# EAGLE board HM-LC-SW1-PCB (EAGLE 7.7.0)

Size 160 x 100 mm. Coordinates in mm from the lower left corner, seen from the top.
Outline: 0,0 160,0 160,100 0,100 0,0
Copper layers (1*16): Top 0.035mm / dielectric 1.5mm / Bottom 0.035mm
Design rules "default": minimum track width 10mil, minimum drill 24mil, track to track 8mil, track to pad 8mil, pad to pad 8mil, via to via 8mil, smd to smd 8mil, copper to edge 40mil, drill to drill 8mil, minimum pad ring 10mil, minimum via ring 8mil, stop-mask expansion 4mil, vias tented up to drill 0mil, thermal gap 10mil

## Footprints (pad centres in the part's own frame; a part is rotated, then mirrored left to right if it is on the bottom)
LÖTPAD = drill 1 pad 1.93: 1 0,0
C2,54 = drill 0.8 pad 1.6: 1 0,0; 2 0,2.54
EB5D = drill 0.9 pad 1.6: + -1.27,0; - 1.27,0
MINITAST = drill 1.1 pad 1.778: 1A -2.299,3.299; 1B -2.249,-3.201; 2A 2.281,3.299; 2B 2.231,-3.151
CC1101 = smd 2.54 x 1.27: ANT 9.84,-2.38; CSN -10.66,-8.38; GDO0 -10.66,-6.38; GDO2 -10.66,-4.38; GND -10.66,3.62; GNDA1 9.84,-0.38; GNDA2 9.84,-4.38; SCLK -10.66,-0.38; SI -10.66,1.62; SO -10.66,-2.38; VCC -10.66,5.62 | drill 0.8 pad 1.6: ANT1 8.34,-2.38; CSN1 -9.16,-8.38; GDO01 -9.16,-6.38; GDO21 -9.16,-4.38; GND1 -9.16,3.62; GNDA11 8.34,-0.38; GNDA21 8.34,-4.38; SCLK2 -9.16,-0.38; SI2 -9.16,1.62; SO2 -9.16,-2.38; VCC2 -9.16,5.62
TO252-5-11 = smd 0.8 x 1.6: 1 -2.28,-5.41; 2 -1.14,-5.41; 4 1.14,-5.41; 5 2.28,-5.41 | smd 6 x 6: TAB 0,1.3
LED3MM = drill 0.8 pad 1.6: A 1.27,0; K -1.27,0
1/8W = drill 0.9 pad 1.6: 1 0,0; 2 10.16,0
PRO_MINI_WO_RS_A6_A7 = drill 1: A0 7.62,-3.81; A1 7.62,-1.27; A2 7.62,1.27; A3 7.62,3.81; A4 5.08,2.54; A5 5.08,5.08; D2 -7.62,3.81; D3 -7.62,1.27; D4 -7.62,-1.27; D5 -7.62,-3.81; D6 -7.62,-6.35; D7 -7.62,-8.89; D8 -7.62,-11.43; D9 -7.62,-13.97; D10 7.62,-13.97; D11 7.62,-11.43; D12 7.62,-8.89; D13 7.62,-6.35; GND -7.62,6.35; GND@1 7.62,11.43; RAW 7.62,13.97; RST 7.62,8.89; RST@1 -7.62,8.89; RX -7.62,11.43; TX -7.62,13.97; VCC 7.62,6.35

## Placement (x,y rotation side)
+VCC  [LÖTPAD]  -55.88,-48.26 0 top  (outside the outline)
C1  100nF  [C2,54]  -74.93,-69.85 0 top  (outside the outline)
C2  10µF  [EB5D]  -73.66,-86.36 0 top  (outside the outline)
CONFIG  MINITAST  [MINITAST]  -54.61,-25.4 0 top  (outside the outline)
GND  [LÖTPAD]  -55.88,-68.58 0 top  (outside the outline)
IC1  CC1101  [CC1101]  -25.4,46.99 0 top  (outside the outline)
IC2  ITS428L2  [TO252-5-11]  -72.39,-99.06 0 top  (outside the outline)
LED1  [LED3MM]  -33.02,-13.97 0 top  (outside the outline)
OUT  OUT  [LÖTPAD]  -72.39,-116.84 0 top  (outside the outline)
R1  330  [1/8W]  -34.29,-30.48 0 top  (outside the outline)
U$1  PRO_MINI_WO_RS_A6_A7  [PRO_MINI_WO_RS_A6_A7]  -22.86,16.51 0 top  (outside the outline)

## Library data of the parts
+VCC GND OUT = 3PASSIVE
C1 = 2KONDEN
C2 = 5becher elko
CONFIG = TASTER
IC1 = cc1101
IC2 = infineon; OC_FARNELL: unknown; OC_NEWARK: unknown
LED1 = LED
R1 = 1WIDER
U$1 = arduinopromini

## Nets
+3V3: IC1.VCC IC1.VCC2 U$1.VCC
GND: C1.1 C2.- CONFIG.1A CONFIG.1B GND.1 IC1.GND IC1.GND1 IC2.1 LED1.K U$1.GND U$1.GND@1
N$1: IC1.CSN IC1.CSN1 U$1.D10
N$2: IC1.SI IC1.SI2 U$1.D11
N$3: IC1.SO IC1.SO2 U$1.D12
N$4: IC1.SCLK IC1.SCLK2 U$1.D13
N$5: IC1.GDO0 IC1.GDO01 U$1.D2
N$6: IC2.2 U$1.D5
N$7: CONFIG.2A CONFIG.2B U$1.D8
N$8: LED1.A R1.1
N$9: R1.2 U$1.D3
N$13: IC1.ANT IC1.ANT1
OUT: IC2.5 OUT.1
VCC: +VCC.1 C1.2 C2.+ IC2.TAB U$1.RAW

## Tracks (layer width: path | path; a pad name or v marks a point on that pad's centre or on a via)
+3V3  (2 unrouted)
GND  (10 unrouted)
N$1  (2 unrouted)
N$2  (2 unrouted)
N$3  (2 unrouted)
N$4  (2 unrouted)
N$5  (2 unrouted)
N$6  (1 unrouted)
N$7  (2 unrouted)
N$8  (1 unrouted)
N$9  (1 unrouted)
N$13  (1 unrouted)
OUT  (1 unrouted)
VCC  (4 unrouted)